# EAGLE board G (EAGLE 9.6.2)
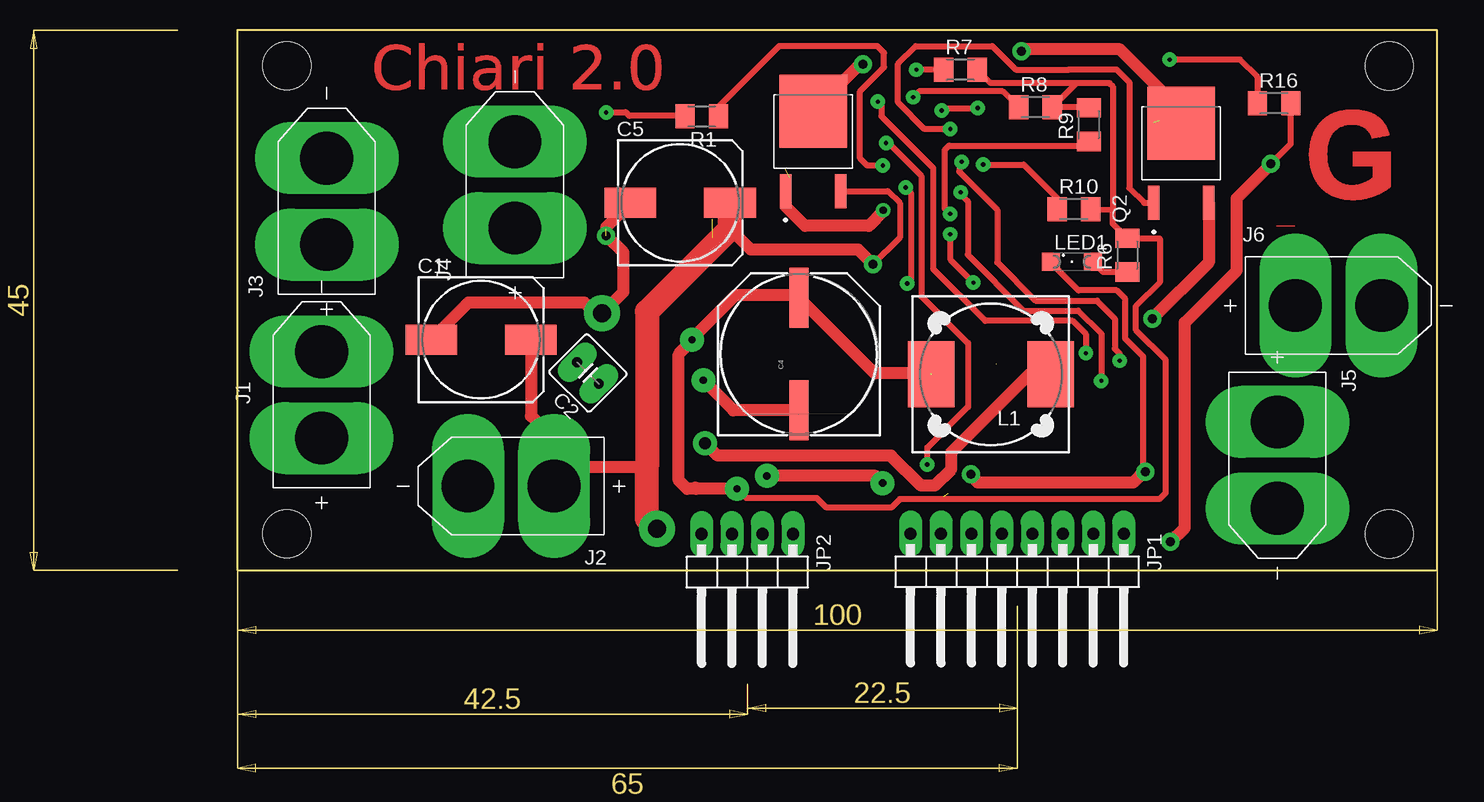
[diagram p0: board, top side]
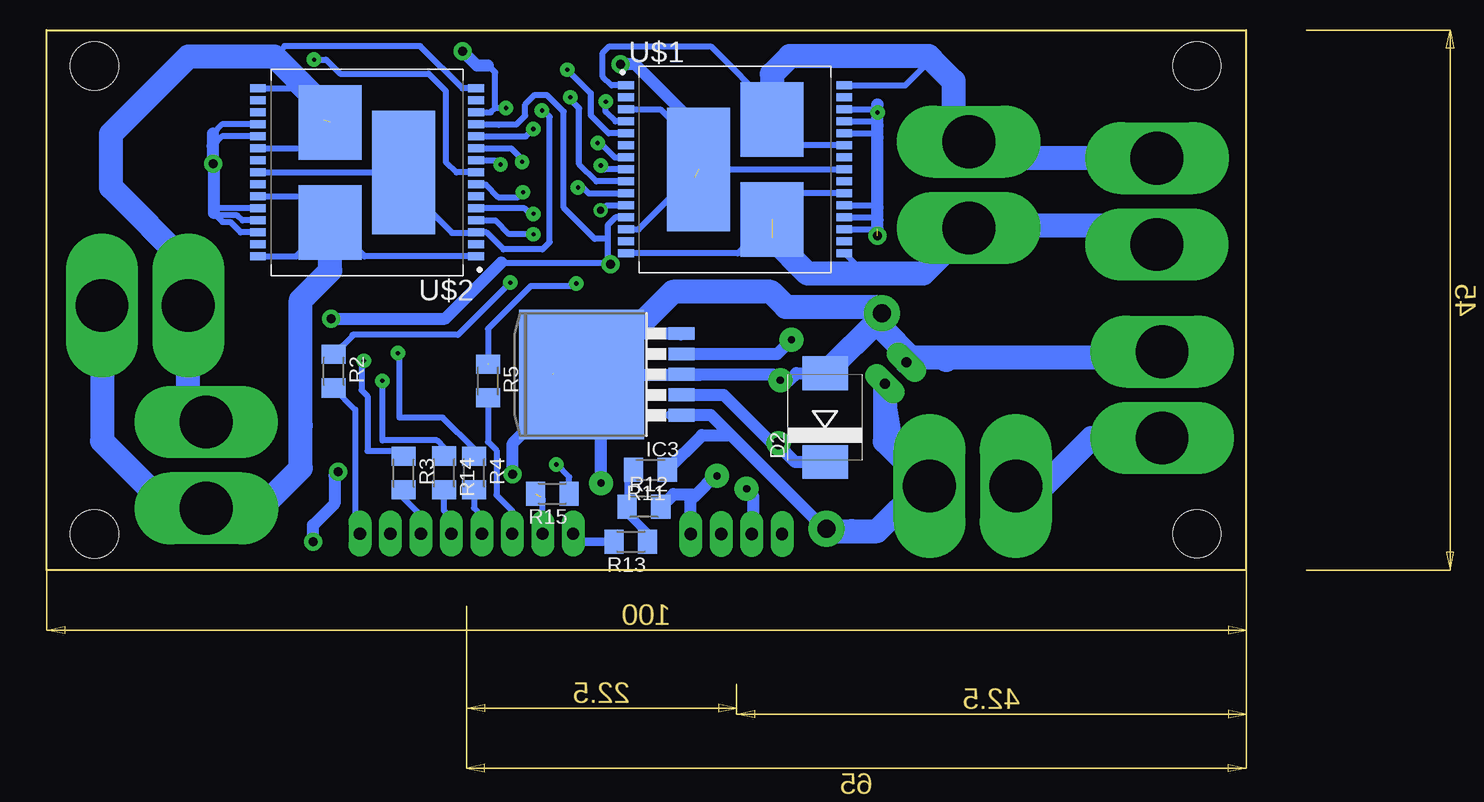
[diagram p1: board, bottom side, seen from below]

Size 100 x 45 mm. Coordinates in mm from the lower left corner, seen from the top.
Outline: 0,0 100,0 100,45 0,45 0,0
Copper layers (1*16): Top 0.035mm / dielectric 1.5mm / Bottom 0.035mm
Design rules "default": minimum track width 6mil, minimum drill 0.35mm, track to track 6mil, track to pad 6mil, pad to pad 6mil, via to via 6mil, smd to smd 6mil, copper to edge 40mil, drill to drill 6mil, minimum pad ring 10mil, minimum via ring 8mil, stop-mask expansion 4mil, vias tented up to drill 0mil, thermal gap 10mil
Holes 4 mm at 96,42 96,3 4.11,3.02 4.11,42.02

## Footprints (pad centres in the part's own frame; a part is rotated, then mirrored left to right if it is on the bottom)
153CLV-1014 = smd 4.3 x 2.5: + 4.15,0; - -4.15,0
C2.5-5 = drill 0.813 pad 1.905 long: 1 -1.27,0; 2 1.27,0
PANASONIC_H13 = smd 5 x 1.6: + 4.7,0; - -4.7,0
SMC = smd 2.8 x 3.8: A 3.7,0; C -3.7,0
TO263-5 = smd 1.067 x 2.159: 1 -3.404,-5.791; 2 -1.702,-5.791; 3 0,-5.791; 4 1.702,-5.791; 5 3.404,-5.791 | smd 10.8 x 10.41: 6 0,2.54
AMASS_XT60-M = drill 4.401 pad 6 long: N 3.6,0 | drill 4.401 pad 5.994 long: P -3.6,0
1X08/90 = drill 1.016 pad 1.905 long: 1 -8.89,-3.81; 2 -6.35,-3.81; 3 -3.81,-3.81; 4 -1.27,-3.81; 5 1.27,-3.81; 6 3.81,-3.81; 7 6.35,-3.81; 8 8.89,-3.81
1X04/90 = drill 1.016 pad 1.905 long: 1 -3.81,-3.81; 2 -1.27,-3.81; 3 1.27,-3.81; 4 3.81,-3.81
DR125 = smd 3.85 x 5.5: 1 -4.975,0; 2 4.975,0
SML1206 = smd 1.5 x 1.5: A 1.75,0; C -1.75,0
TO229P990X239-3N = smd 2.83 x 0.97: 1 -4.14,2.29; 3 -4.14,-2.29 | smd 6.1 x 5.63: 4 2.51,0
M1206 = smd 1.6 x 2: 1 -1.4,0; 2 1.4,0
IC_MULTIPOWERSO-30TR = smd 1.3 x 0.665: 1 -9.1,7; 2 -9.1,6; 3 -9.1,5; 4 -9.1,4; 5 -9.1,3; 6 -9.1,2; 7 -9.1,1; 8 -9.1,0; 9 -9.1,-1; 10 -9.1,-2; 11 -9.1,-3; 12 -9.1,-4; 13 -9.1,-5; 14 -9.1,-6; 15 -9.1,-7; 16 9.1,-7; 17 9.1,-6; 18 9.1,-5; 19 9.1,-4; 20 9.1,-3; 21 9.1,-2; 22 9.1,-1; 23 9.1,0; 24 9.1,1; 25 9.1,2; 26 9.1,3; 27 9.1,4; 28 9.1,5; 29 9.1,6; 30 9.1,7 | smd 5.25 x 10.3: HS1 -3.05,0 | smd 5.25 x 6.23: HS2 3.05,4.165; HS3 3.05,-4.165

## Placement (x,y rotation side)
C1  [153CLV-1014]  20.3,19.2 0 top
C2  [C2.5-5]  29.21,16.41 135 top
C4  [PANASONIC_H13]  46.8,18 90 top
C5  [153CLV-1014]  36.9,30.6 0 top
D2  MBRS320T3  [SMC]  35.09,12.7 90 bottom
IC3  [TO263-5]  52.85,16.3 90 bottom
J1  XT60-M  [AMASS_XT60-M]  7,14.6 90 top
J2  XT60-M  [AMASS_XT60-M]  22.8,7 180 top
J3  XT60-M  [AMASS_XT60-M]  7.44,30.72 90 top
J4  XT60-M  [AMASS_XT60-M]  23.12,32.1 90 top
J5  XT60-M  [AMASS_XT60-M]  86.69,8.74 270 top
J6  XT60-M  [AMASS_XT60-M]  91.78,22.04 0 top
JP1  [1X08/90]  64.99,-0.78 180 top
JP2  [1X04/90]  42.49,-0.81 180 top
L1  DR125  [DR125]  62.8,16.3 180 top
LED1  [SML1206]  69.55,25.69 0 top
Q1  IRFR7440PBF  [TO229P990X239-3N]  47.98,35.72 90 top
Q2  IRFR7440PBF  [TO229P990X239-3N]  78.67,34.73 90 top
R1  [M1206]  38.7,37.8 180 top
R2  [M1206]  76.06,16.57 270 bottom
R3  [M1206]  70.23,8.08 270 bottom
R4  [M1206]  64.36,8.09 270 bottom
R5  [M1206]  63.2,15.75 270 bottom
R6  [M1206]  74.17,26.24 90 top
R7  [M1206]  60.26,41.69 0 top
R8  [M1206]  66.51,38.57 0 top
R9  [M1206]  70.95,37.11 90 top
R10  [M1206]  69.72,30.07 0 top
R11  [M1206]  49.66,8.34 180 bottom
R12  [M1206]  50.2,5.27 0 bottom
R13  [M1206]  51.29,2.36 180 bottom
R14  [M1206]  66.86,8.1 270 bottom
R15  [M1206]  57.84,6.37 180 bottom
R16  [M1206]  86.4,38.9 0 top
U$1  VNH5019A-E  [IC_MULTIPOWERSO-30TR]  42.59,33.38 0 bottom
U$2  VNH5019A-E  [IC_MULTIPOWERSO-30TR]  73.29,33.13 180 bottom

## Library data of the parts
C1 C5 = adafruit
C2 = capacitor-wima-enhanced
C4 = SparkFun-Capacitors
D2 = diode
IC3 = linear
J1-J6 = XT60-M; AVAILABILITY: Not in stock; CHECK_PRICES: https://www.snapeda.com/parts/XT60-M/AMASS/view-part/?ref=eda; DESCRIPTION: Plug; DC supply; XT60; male; PIN: 2; for cable; soldered; 30A; 500V; MF: AMASS; MP: XT60-M; PACKAGE: Package; PRICE: None; SNAPEDA_LINK: https://www.snapeda.com/parts/XT60-M/AMASS/view-part/?ref=snap
JP1 = pinhead-enhanced-2
JP2 = pinhead-enhanced
L1 = inductors; SPICEPREFIX: L
LED1 = led
Q1 Q2 = IRFR7440PBF; AVAILABILITY: In Stock; CHECK_PRICES: https://www.snapeda.com/parts/IRFR7440PBF/Infineon+Technologies/view-part/?ref=eda; DESCRIPTION: RoHS Compliant | Improved Gate, Avalanche and Dynamic dV/dt Ruggedness | Fully Characterized Capacitance and Avalanche SOA | Enhanced body diode dV/dt and dI/dt Capability; MF: Infineon Technologies; MP: IRFR7440PBF; PACKAGE: TO-252 Infineon; PRICE: None; SNAPEDA_LINK: https://www.snapeda.com/parts/IRFR7440PBF/Infineon+Technologies/view-part/?ref=snap
R1-R16 = rcl; SPICEPREFIX: R
U$1 U$2 = VNH5019A-E; AVAILABILITY: In Stock; CHECK_PRICES: https://www.snapeda.com/parts/VNH5019A-E/STMicroelectronics/view-part/?ref=eda; DESCRIPTION: - Motor Driver Power MOSFET Parallel, PWM MultiPowerSO-30; MF: STMicroelectronics; MP: VNH5019A-E; PACKAGE: PowerSOP-30 STMicroelectronics; PRICE: None; PURCHASE-URL: https://www.snapeda.com/api/url_track_click_mouser/?unipart_id=231156&manufacturer=STMicroelectronics&part_name=VNH5019A-E&search_term=None; SNAPEDA_LINK: https://www.snapeda.com/parts/VNH5019A-E/STMicroelectronics/view-part/?ref=snap

## Nets
5V: C4.+ IC3.4 JP2.3 L1.2 R6.2 R7.2 R8.2 R9.2 R10.2
GND: C1.- C2.2 C4.- C5.- D2.A IC3.3 IC3.5 IC3.6 J1.N JP2.1 LED1.C R1.2 R12.2 R16.2 U$1.18 U$1.19 U$1.20 U$1.26 U$1.27 U$1.28 U$2.19 U$2.20 U$2.26 U$2.27 U$2.28
IN1A: JP1.1 R2.2
IN1B: JP1.3 R3.2
IN2A: JP1.5 R4.2
IN2B: JP1.6 R5.2
N$1: Q1.1 U$1.11
N$2: R7.1 U$1.5
N$4: LED1.A R6.1
N$5: R8.1 U$1.9
N$6: R9.1 U$2.5
N$7: R10.1 U$2.9
N$8: R11.2 R12.1 R13.1
N$9: R4.1 U$1.4
N$10: R5.1 U$1.10
N$11: R2.1 U$2.4
N$12: R3.1 U$2.10
N$13: D2.C IC3.2 L1.1
N$14: R15.1 U$1.7
N$15: R14.1 U$2.7
N$16: Q1.4 U$1.3 U$1.13 U$1.23 U$1.HS1
N$17: Q2.1 U$2.11
N$18: Q2.4 U$2.3 U$2.13 U$2.23 U$2.HS1
N$19: R1.1 U$1.8
N$20: R16.1 U$2.8
N$24: U$2.18
OUT1: J3.N J4.N U$1.1 U$1.25 U$1.30 U$1.HS2
OUT2: J3.P J4.P U$1.15 U$1.16 U$1.21 U$1.HS3
OUT3: J5.N J6.N U$2.1 U$2.25 U$2.30 U$2.HS2
OUT4: J5.P J6.P U$2.15 U$2.16 U$2.21 U$2.HS3
PWM1: JP1.4 R14.2
PWM2: JP1.7 R15.2
VPOWER: C1.+ C2.1 C5.+ IC3.1 J2.P Q1.3 Q2.3 R11.1 U$1.12 U$2.12
VPOWER_SENSE: JP1.8 R13.2
VPREV: J1.P J2.N

## Tracks (layer width: path | path; a pad name or v marks a point on that pad's centre or on a via)
5V  (via drill 0.6 pad 2)  (1 unrouted)
  Top 0.152: R6.2 73.97,27.64
  Top 0.5: 69.91,40.57 72.69,40.57 72.95,40.31 72.95,30.07 | 69.91,40.57 62.78,40.57 R7.2 | R10.2 72.91,30.03 72.95,30.07 | R9.2 70.89,38.57 R8.2 69.91,40.57 | v41.63,6.76 42.39,6 48.3,6 49.1,5.2 54.5,5.2 55.2,5.9 76.85,5.9 77.38,6.43 77.38,17.52 74.9,20 74.9,22 76.87,23.97 76.87,27.61 76.84,27.64 R6.2 72.95,28.86 72.95,30.07
  Top 1: v37.89,19.18 37.89,19.28 41.51,22.89 46.99,22.89 C4.+ 53.1,16.39 57.77,16.39 | v41.63,6.76 38.25,6.76 | 38.25,6.76 38.15,6.87 | v37.89,19.18 37.89,19.08 36.78,17.97 36.78,7.47 37.49,6.76 38.25,6.76 | v37.89,19.18 37.91,19.2
  Bottom 1: v37.89,19.18 39.07,18 IC3.4 | JP2.3 41.12,3.1 41.12,6.25 v41.63,6.76
GND  (via drill 0.35 pad 1.2, 0.6 pad 2, 0.75 pad 1.5, 1.5 pad 3)  (1 unrouted)
  Top 0.5: 75.69,8.3 v75.69,8.2 75.49,8.4 75.49,17.8 74,19.29 74,22.6 73.3,23.3 70.1,23.3 67.8,25.6 LED1.C | R1.2 37.25,37.85 32.65,37.85 32.33,38.17 32.33,38.13 v30.73,38.13 | v86.12,33.84 87.8,35.52 R16.2
  Top 1: v53.78,7.25 53.19,7.84 v44.12,7.84 | v61.13,7.96 61.13,7.86 61.71,7.28 74.67,7.28 75.69,8.3 | v77.78,2.35 78.95,3.52 78.95,20.61 83.29,24.95 83.29,30.96 86.15,33.82 v86.12,33.84 | C1.- 19.25,22.3 28.9,22.3 29.81,21.39 v30.37,21.39 32.16,23.18 32.16,26.44 v30.73,27.87 30.73,28.58 C5.- | C4.- 41.34,13.3 v38.83,15.81
  Bottom 0.5: 60.34,11.35 IC3.6 | U$1.18 30.73,28.38 | U$1.19 30.96,29.38 30.73,29.15 | U$1.20 30.9,30.38 30.73,30.21 | U$1.26 31.06,36.38 30.73,36.05 | U$1.27 31.07,37.38 30.73,37.04 | U$1.28 30.98,38.38 v30.73,38.13 | U$2.19 85.37,37.13 86.13,36.37 | U$2.20 85.36,36.13 86.13,35.37 86.16,35.34 | U$2.27 83.67,29.13 84.09,29.55 85.86,29.55 | U$2.26 85.7,30.13 86.06,29.77 | U$2.28 83.82,28.13 84.71,29.02 85.33,29.02 85.86,29.55 | 86.06,29.75 85.86,29.55
  Bottom 0.7: R12.2 48.49,5.27
  Bottom 1: 56.35,17.26 IC3.6 | IC3.3 47.02,16.26 | 47.02,16.34 IC3.3 | IC3.6 54.89,16.3 54.86,16.33 | 47.14,19.62 IC3.5 51.99,19.7 IC3.6 | IC3.6 55.37,16.28 45.44,16.28 | IC3.3 45.31,16.3 | R12.2 47.74,6.33 45.78,6.33 | 45.78,6.33 44.27,7.84 v44.12,7.84 | IC3.6 53.78,14.69 v53.78,7.25 | v61.13,7.96 61.13,10.56 60.34,11.35 | v30.73,27.87 30.73,28.38 | 30.73,28.42 30.73,29.15 30.73,30.21 30.73,36.05 30.73,37.04 v30.73,38.13 30.73,38.78 30.76,38.81 | 77.78,2.4 v77.78,2.35 77.78,3.75 76,5.53 76,7.89 v75.69,8.2 | 86.16,35.34 86.16,33.88 v86.12,33.84 86.06,33.78 86.06,29.77 86.06,29.75 | 86.13,35.37 86.13,36.37 | JP2.1 46.3,5.81 45.78,6.33 | D2.A 37.5,16.4 38.09,15.81 v38.83,15.81 38.93,15.81 39.42,16.3 IC3.3
  Bottom 2: IC3.6 54.66,16.3 47.79,23.17 39.61,23.17 38.37,21.93 30.91,21.93 v30.37,21.39 | v30.37,21.39 30.2,21.22 | 24.8,17.7 7.5,17.7 J1.N | 25.01,17.49 24.8,17.7 | 24.8,17.7 27.92,17.7 | 27.92,17.7 C2.2 | v30.37,21.39 30.37,20.15 27.92,17.7 | D2.A 30.37,21.12 v30.37,21.39
IN1A
  Bottom 0.5: R2.2 74.26,13.37 74.26,3.41 JP1.1
IN1B
  Bottom 0.5: JP1.3 68.8,4.55 70.23,5.98 R3.2
IN2A
  Bottom 0.5: R4.2 64.36,5.17 63.72,4.53 JP1.5
IN2B
  Bottom 0.5: JP1.6 61.18,4.93 62.49,6.24 62.49,9.97 63.2,10.68 R5.2 63.4,14.55
N$1  (via drill 0.6 pad 1.2)
  Top 1: v53.82,29.98 53.82,29.88 52.62,28.68 47.32,28.68 45.69,30.31 Q1.1
  Bottom 0.5: v53.82,29.98 53.68,29.98 53.28,30.38 U$1.11
N$2  (via drill 0.35 pad 1.2)
  Top 0.5: R7.1 v56.59,41.69
  Bottom 0.5: v56.59,41.69 54.64,39.74 54.64,37.88 53.14,36.38 U$1.5
N$4
  Top 0.5: LED1.A 72.15,24.84 R6.1
N$5  (via drill 0.35 pad 1.2)
  Top 0.5: R8.1 63.79,39.89 56.82,39.89 v56.33,39.4
  Bottom 0.5: U$1.9 54.17,32.38 55.6,33.81 55.6,38.47 56.33,39.2 v56.33,39.4
N$6  (via drill 0.35 pad 1.2)
  Top 0.5: 70.41,35.17 R9.1 70.6,35.36 59.31,35.36 58.96,35.01 58.96,30.13 v59.41,29.68
  Bottom 0.5: U$2.5 60.15,30.13 59.7,29.68 v59.41,29.68
N$7  (via drill 0.35 pad 1.2)
  Top 0.5: v62.15,33.79 65.54,33.79 68.32,31.01 R10.1
  Bottom 0.5: U$2.9 62.65,34.13 62.31,33.79 v62.15,33.79
N$8
  Bottom 0.5: R11.2 51.6,7.8 R12.1
  Bottom 0.7: R13.1 49.89,3.06 51.6,4.77 R12.1
N$9  (via drill 0.35 pad 1.2)
  Top 0.5: v53.38,39.03 53.66,38.75 53.66,37.83 57.98,33.51 57.98,25.12 62.33,20.77 69.62,20.77 70.72,19.67 v70.72,18.07
  Bottom 0.5: U$1.4 52.58,37.38 53.38,38.18 v53.38,39.03 | R4.1 64.36,10.09 66.97,12.7 70.6,12.7 70.6,17.95 v70.72,18.07
N$10  (via drill 0.35 pad 1.2)  (1 unrouted)
  Top 0.5: v55.7,31.88 56.13,31.45 56.13,24.18 v55.83,23.88
  Bottom 0.5: 55.66,31.84 v55.7,31.88 55.5,32.08 54.8,31.38 U$1.10 | 56.27,23.88 v55.83,23.88 56.03,23.68 59.62,23.68 63.2,20.1 63.2,17.2
N$11  (via drill 0.35 pad 1.2)
  Top 0.5: v61.34,23.95 | v61.34,23.95 59.43,25.86 59.43,27.96 v59.41,27.98
  Bottom 0.5: v59.41,27.98 61.44,27.98 62.59,29.13 U$2.4 | v61.34,23.95 61.44,23.85 61.45,23.85 65.7,19.6 74.5,19.6 74.5,19.53 R2.1
N$12  (via drill 0.35 pad 1.2)
  Top 0.5: v60.36,34.01 60.16,34.01 60.16,33.2 63.34,30.02 63.34,25.64 66.53,22.45 71.64,22.45 73.14,20.95 73.14,18.45 73.54,18.04 v73.54,17.44
  Bottom 0.5: v60.36,34.01 60.36,34.31 60.45,34.31 61.27,35.13 U$2.10 | 70.14,9.57 R3.1 70.65,9.9 73.24,9.9 73.24,14.5 73.74,15 73.74,17.24 v73.54,17.44
N$13  (via drill 1 pad 2)
  Top 1: v38.99,10.58 40.03,9.54 41.7,9.54 54.48,9.54 56.98,7.04 58.13,7.04 59.5,8.41 59.5,9.8 66,16.3 L1.1
  Bottom 1: IC3.2 43.55,14.6 39.53,10.58 v38.99,10.58 39.08,10.49 37.59,9 D2.C
N$14  (via drill 0.35 pad 1.2)
  Top 0.5: v54.06,35.59 54.26,35.59 57,32.85 57,22.8 60.9,18.9 60.9,13.6 57.5,10.2 v57.5,8.8
  Bottom 0.5: 54.01,35.59 v54.06,35.59 53.86,35.59 52.65,34.38 U$1.7 | R15.1 56.44,7.74 v57.5,8.8
N$15  (via drill 0.35 pad 1.2)
  Top 0.5: v60.28,31.48 60.28,31.32 60.87,30.73 60.87,26.28 65.53,21.62 70.09,21.62 72,19.71 v72,15.76
  Bottom 0.5: R14.1 66.86,10.2 67.46,10.8 72,10.8 v72,15.76 | v60.28,31.48 60.68,31.08 62.35,31.08 63.4,32.13 U$2.7
N$16  (via drill 0.75 pad 1.5)  (1 unrouted)
  Top 1: v52.15,42.14 51.89,42.14 Q1.4
  Bottom 0.5: U$1.HS1 U$1.23 | U$1.3 51.67,38.4 48.83,38.4 45.64,35.2 U$1.HS1 | U$1.13 50.64,28.38 U$1.HS1
  Bottom 1: 45.99,32.73 45.99,37.17 50.96,42.14 v52.15,42.14
N$17  (via drill 0.35 pad 1.2)
  Top 0.5: v59.42,36.75 57.28,36.75 55.06,38.97 55.06,42.17 56.55,43.66 62.91,43.66 64.88,41.69 69.3,41.69 69.32,41.71 73.28,41.71 74.34,40.65 74.34,31.83 75.58,30.59 Q2.1
  Bottom 0.5: U$2.11 60.04,36.13 v59.42,36.75
N$18  (via drill 0.35 pad 1.2, 0.75 pad 1.5)
  Top 0.5: v58.7,38.3 58.9,38.5 v61.7,38.5
  Top 1: Q2.4 78.67,38.28 73.56,43.39 65.33,43.39 v65.33,43.24
  Bottom 0.5: U$2.23 70.44,33.13 | 70.44,33.13 U$2.HS1 | 70.44,34.95 70.44,33.13 | U$2.3 64.22,28.16 | 70.24,30.74 U$2.HS1 | U$2.3 64.12,28.06 | U$2.3 63.32,28.13 61.91,26.72 58.66,26.72 58.06,27.32 58.06,37.76 58.6,38.3 v58.7,38.3 | U$2.13 62.97,38.13 62.6,38.5 | 62.6,38.5 62.6,41.46 63.2,42.06 | v61.7,38.5 62.6,38.5 | U$2.HS1 70.24,32.14 66.2,28.1 64.22,28.1 U$2.3
  Bottom 1: v65.33,43.24 64.15,42.06 63.2,42.06
N$19  (via drill 0.35 pad 1.2)
  Top 0.5: v53.8,33.7 52.5,33.7 51.9,34.3 51.9,39.9 53.9,41.9 53.9,43.1 53.34,43.66 45.16,43.66 40.1,38.6 R1.1
  Bottom 0.5: U$1.8 53.48,33.38 v53.8,33.7
N$20  (via drill 0.35 pad 1.2)
  Top 0.5: v77.7,42.53 83.57,42.53 85,41.1 R16.1
  Bottom 0.5: U$2.8 65.83,33.13 66.7,34 66.7,39.9 68.16,41.36 75.53,41.36 76.7,42.53 v77.7,42.53
OUT1
  Bottom 0.5: U$1.30 28.42,40.38 26.23,42.57 | U$1.25 37.38,35.38 U$1.HS2 39.54,38.54 44.63,43.63 53.1,43.63 53.63,43.1 53.63,41.11 52.9,40.38 U$1.1
  Bottom 2: J3.N 21.74,34.32 J4.N 24.39,36.97 24.39,40.73 26.23,42.57 | U$1.HS2 39.54,41.32 38.04,42.82 26.48,42.82
OUT2  (1 unrouted)
  Bottom 0.5: U$1.21 37.38,31.38 U$1.HS3 39.83,28.93 42.38,26.38 U$1.15 | U$1.16 31.8,24.69 30.99,24.69
  Bottom 2: J3.P 9.04,28.72 22.9,28.72 J4.P 26.93,24.69 30.99,24.69 36.56,24.69 39.54,27.67 | U$1.HS3 39.83,28.93 U$1.HS3
OUT3
  Bottom 0.5: U$2.25 78.5,31.13 U$2.HS2 | U$2.30 79.17,26.13 U$2.HS2 | U$2.1 73.5,26.13 U$2.HS2
  Bottom 2: J6.N 95.38,10.75 89.77,5.14 J5.N 82.16,5.14 78.8,8.5 78.8,12.06 78.8,22.49 76.34,24.95 U$2.HS2
OUT4  (1 unrouted)
  Bottom 0.5: U$2.16 79.51,40.13 76.85,37.47 | U$2.21 78.5,35.13 U$2.HS3 | U$2.15 65.33,40.13 68.86,43.66 80.16,43.66 81.01,42.81
  Bottom 2: J5.P 88.18,13.83 J6.P 88.18,25.44 94.62,31.88 94.62,36.35 88.16,42.81 81.01,42.81 76.34,38.14 U$2.HS3
PWM1
  Bottom 0.5: JP1.4 66.26,4.35 66.86,4.95 R14.2
PWM2  (1 unrouted)
  Bottom 0.5: 58.64,5.91 58.83,6.1 | JP1.7 58.64,5.77 R15.2
VPOWER  (via drill 0.75 pad 1.5, 1.5 pad 3)
  Top 0.5: Q1.3 54.22,31.58 55.2,30.6 55.2,27.7 v52.98,25.48
  Top 1: Q2.3 80.96,25.62 v76.27,20.93 | C1.+ 24.45,12.85 28.7,8.6 34.13,8.6 | 41.05,28.45 42.8,26.7 51.76,26.7 v52.98,25.48
  Top 2: v34.97,3.45 34.13,4.29 34.13,8.6 34.13,21.54 41.05,28.45 C5.+
  Bottom 0.5: U$1.12 52.58,29.38 53.22,28.75 53.22,27.6 | 62.09,25.62 53.12,25.62 v52.98,25.48 53.22,25.48 53.22,27.6 | U$2.12 62.33,37.13 | 62.33,37.13 60.83,37.13 60.1,37.86 60.1,38.8 59.3,39.6 58.3,39.6 56.9,38.2 56.9,30.2 54.3,27.6 53.22,27.6 | 62.33,37.13 62.3,37.1
  Bottom 1: IC3.1 44.62,12.9 42.96,11.24 | v34.97,3.45 35.17,3.45 42.96,11.24 | v76.27,20.93 v76.26,20.94 66.77,20.94 62.09,25.62 | 31.89,3.24 32.86,3.24 | J2.P 26.85,7.45 28.9,9.5 29.81,15.01 | IC3.1 47.9,12.9 IC3.1 | R11.1 45.36,11.24 42.96,11.24
  Bottom 2: J2.P 27,7 30.76,3.24 32.86,3.24 34.76,3.24 v34.97,3.45 | C2.1 30.11,10.71 26.85,7.45
VPOWER_SENSE
  Bottom 0.7: JP1.8 55.43,2.36 R13.2
VPREV
  Bottom 2: J1.P 12.9,11 16.9,7 J2.N
(copper drawn outside any net)
  shapes: Top area x1940

## Text on the board
200bmp: C:/Users/Ariel/GitHub/Sumo-Robot-Programs-Database/boards/mejoras/I/chiari.bmp